# Altium PCB Project1.PcbDoc
Units mm, origin at the board's own origin, x right, y up, seen from the top; angles counter-clockwise.
Board outline 70 x 75 mm, 2 copper layers (Top Layer, Bottom Layer); 67 components, 52 nets, 266 pads, 0 vias.
Unrouted connection lines stored in the file: 162.
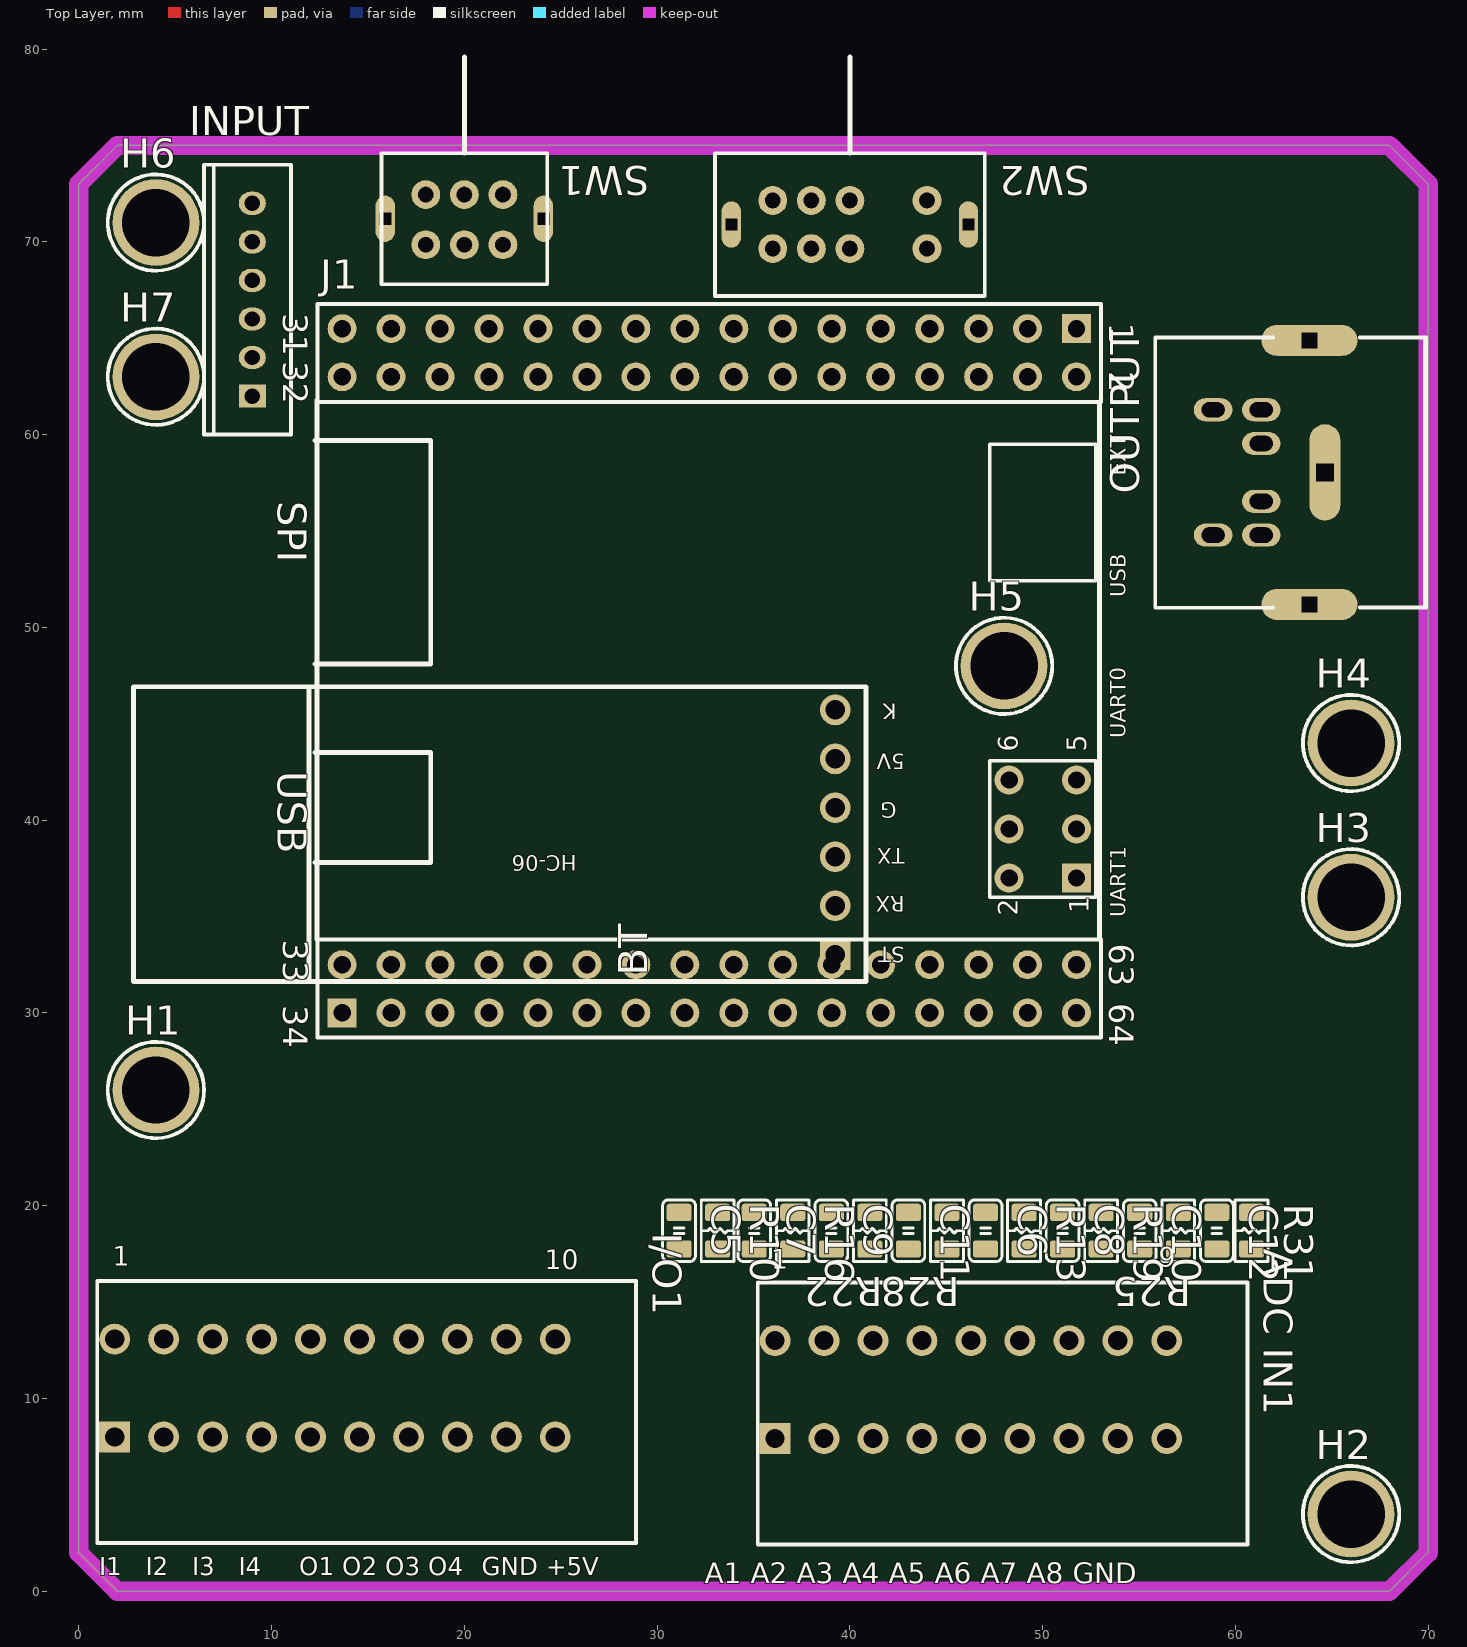
[diagram p0: Top Layer view]
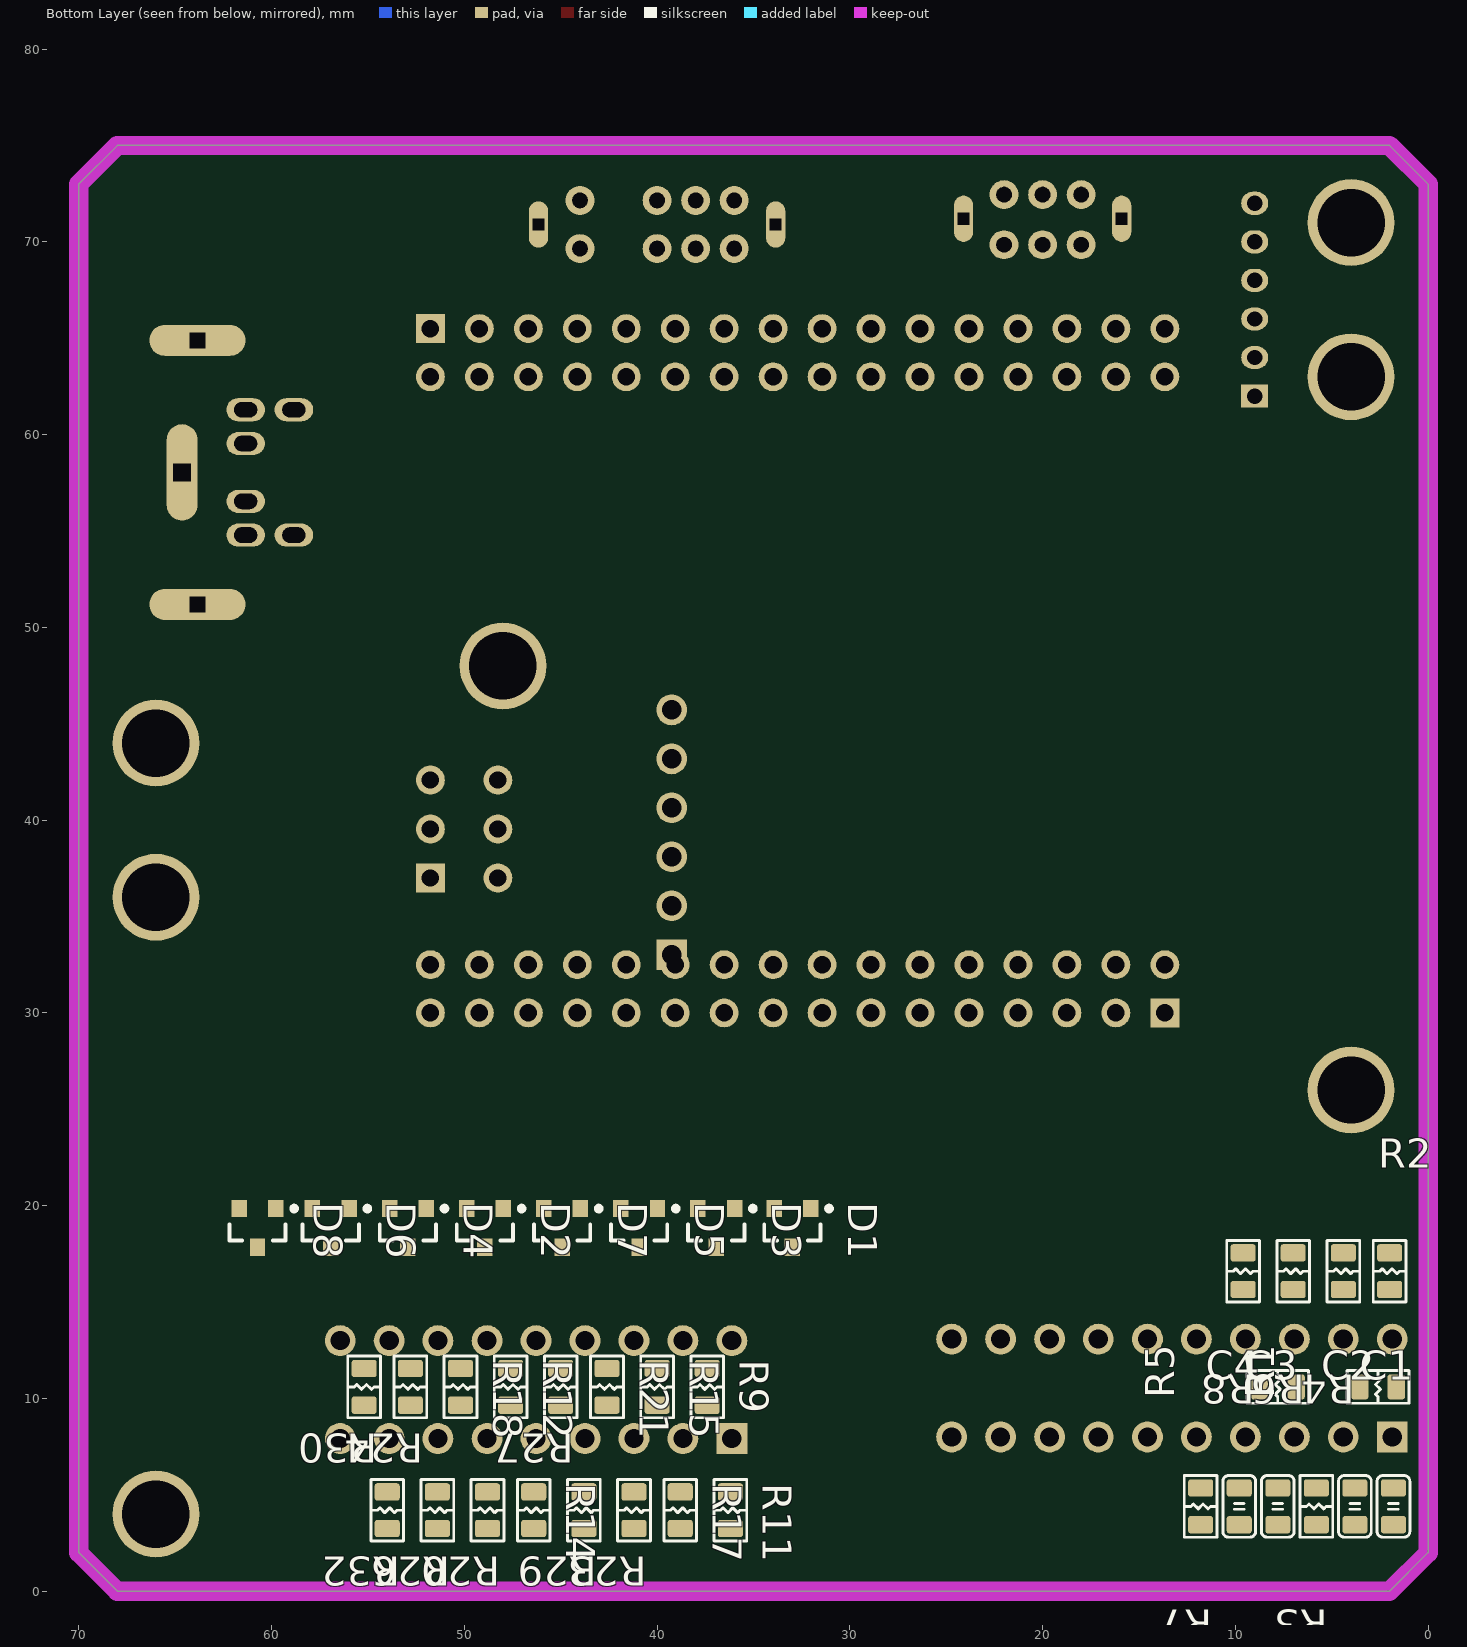
[diagram p1: Bottom Layer view, seen from below]

## Layer stack, top to bottom
Top Solder: solder mask 0.0102, Solder Resist, Dk 3.5
Top Layer: signal copper 0.0356
Dielectric 1: dielectric 0.32, FR-4, Dk 4.8
Bottom Layer: signal copper 0.0356
Bottom Solder: solder mask 0.0102, Solder Resist, Dk 3.5

## Board outline
0,2 2,0 68,0 70,2 70,73 68,75 2,75 0,73

## Design rules (kind name [scope] priority, off if disabled: settings)
Clearance [All] p1: gap=0.254 ignorepadtopadclearanceinfootprint=FALSE except(0: Arc-Hole Track-Hole SMDPad-Hole THPad-Hole Via-Hole Fill-Hole Poly-Hole Region-Hole Text-Hole)
PolygonConnect [All] p1: connectstyle=Relief reliefconductorwidth=0.254 reliefentries=4 polygonreliefangle="90 Angle" airgapwidth=0.254
RoomDefinition CON_MCU [InComponentClass('CON_MCU')] p1: confinementstyle=ConfineIn formatcopy=TRUE lockcomponents=FALSE outline -111.506,-66.802 -60.706,-66.802 -60.706,-41.402 -111.506,-41.402
RoomDefinition "ADC SCH" [InComponentClass('ADC SCH')] p2: confinementstyle=ConfineIn formatcopy=TRUE lockcomponents=FALSE outline -111.506,-66.802 -60.706,-66.802 -60.706,-41.402 -111.506,-41.402
RoutingVias [All] p1: holewidth=0.6 width=1 viastyle="Through Hole" minholewidth=0.6 minwidth=1 maxholewidth=0.711 maxwidth=1.27
SolderMaskExpansion [All] p1: expansion=0.102 istentingtop=FALSE
Width [All] p1: maxlimit=0.254 minlimit=0.254 preferedwidth=0.254
30 further rules are at their usual default settings.

## Classes and differential pairs
net class PWR: 5V 12V GND
component class CON_MCU: "ADC IN1" BT C1 C2 C3 C4 H1 H2 H3 H4 H5 H6 H7 I/O1 INPUT J1 OUTPUT R1 R2 R3 R4 R5 R6 R7 R8 SW1 SW2
component class "ADC SCH": C5 C6 C7 C8 C9 C10 C11 C12 D1 D2 D3 D4 D5 D6 D7 D8 R9 R10 R11 R12 R13 R14 R15 R16 R17 R18 R19 R20 R21 R22 R23 R24 R25 R26 R27 R28 R29 R30 R31 R32

## Components (designator, comment, footprint, x,y, rotation, side; value= is the part's Value field where it differs from the comment)
"ADC IN1" "SL900R-9" SL-900R-9 46.28,10.46 r0 top
BT "HC-06" HC-06 39.243,33.02 r180 top
C1 "1nF" C2012 1.8,4.4 r90 bottom
C2 "1nF" C2012 3.8,4.4 r90 bottom
C3 "1nF" C2012 7.8,4.4 r90 bottom
C4 "1nF" C2012 9.8,4.4 r90 bottom
C5 "100pF" C2012 31.138,18.7 r270 top
C6 "100pF" C2012 47.038,18.7 r270 top
C7 "100pF" C2012 35.038,18.7 r270 top
C8 "100pF" C2012 51.038,18.7 r270 top
C9 "100pF" C2012 39.038,18.7 r270 top
C10 "100pF" C2012 55.038,18.7 r270 top
C11 "100pF" C2012 43.038,18.7 r270 top
C12 "100pF" C2012 59.038,18.7 r270 top
D1 "MMBZ33VALT1G" ONSC-SOT-23-3-318-08_V 32.98,18.85 r270 bottom
D2 "MMBZ33VALT1G" ONSC-SOT-23-3-318-08_V 48.93,18.85 r270 bottom
D3 "MMBZ33VALT1G" ONSC-SOT-23-3-318-08_V 36.93,18.85 r270 bottom
D4 "MMBZ33VALT1G" ONSC-SOT-23-3-318-08_V 52.93,18.85 r270 bottom
D5 "MMBZ33VALT1G" ONSC-SOT-23-3-318-08_V 40.93,18.85 r270 bottom
D6 "MMBZ33VALT1G" ONSC-SOT-23-3-318-08_V 56.93,18.85 r270 bottom
D7 "MMBZ33VALT1G" ONSC-SOT-23-3-318-08_V 44.93,18.85 r270 bottom
D8 "MMBZ33VALT1G" ONSC-SOT-23-3-318-08_V 60.73,18.85 r270 bottom
H1 "HOLE" HOLE_3MM 4,26 r0 top
H2 "HOLE" HOLE_3MM 66,4 r0 top
H3 "HOLE" HOLE_3MM 66,36 r0 top
H4 "HOLE" HOLE_3MM 66,44 r0 top
H5 "HOLE" HOLE_3MM 48,48 r0 top
H6 "HOLE" HOLE_3MM 4,71 r0 top
H7 "HOLE" HOLE_3MM 4,63 r0 top
I/O1 "SL900R-10" SL-900R-10 13.29,10.54 r0 top
INPUT "2.54mm 6 HOLE" "2.54mm 6 HOLE" 9,62 r90 top
J1 "ATMEL MODULE" "ATMEL MODULE" 32.71,47.75 r270 top
OUTPUT "MD-60S/DIN6PIN" "TAIT-MDS-508B6L_V - duplicate" 69.843,58.039 r180 top
R1 "1K" R2012 2.6,10.6 r0 bottom
R2 "10K" R2012 2,16.6 r90 bottom
R3 "1K" R2012 5.8,4.4 r270 bottom
R4 "10K" R2012 4.4,16.6 r270 bottom
R5 "1K" R2012 7.8,10.6 r0 bottom
R6 "10K" R2012 7,16.6 r270 bottom
R7 "1K" R2012 11.8,4.4 r270 bottom
R8 "10K" R2012 9.6,16.6 r270 bottom
R9 "1K" R2012 37.4,10.6 r270 bottom
R10 "1K" R2012 33.138,18.7 r270 top
R11 "1M" R2012 36.2,4.2 r270 bottom
R12 "1K" R2012 47.6,10.6 r270 bottom
R13 "1K" R2012 49.038,18.7 r270 top
R14 "1M" R2012 46.4,4.2 r270 bottom
R15 "1K" R2012 40,10.6 r270 bottom
R16 "1K" R2012 37.038,18.7 r270 top
R17 "1M" R2012 38.8,4.2 r270 bottom
R18 "1K" R2012 50.2,10.6 r270 bottom
R19 "1K" R2012 53.038,18.7 r270 top
R20 "1M" R2012 48.8,4.2 r270 bottom
R21 "1K" R2012 42.6,10.6 r270 bottom
R22 "1K" R2012 41.038,18.7 r270 top
R23 "1M" R2012 41.2,4.2 r270 bottom
R24 "1K" R2012 52.8,10.6 r270 bottom
R25 "1K" R2012 57.038,18.7 r270 top
R26 "1M" R2012 51.4,4.2 r270 bottom
R27 "1K" R2012 45,10.6 r270 bottom
R28 "1K" R2012 45.038,18.7 r270 top
R29 "1M" R2012 43.8,4.2 r270 bottom
R30 "1K" R2012 55.2,10.6 r270 bottom
R31 "1K" R2012 60.838,18.7 r270 top
R32 "1M" R2012 54,4.2 r270 bottom
SW1 "OS202011MA0QN1" OS202011MA0QN1 20,74.6 r270 top
SW2 "OS203011MA2QP1" OS203011MA2QP1 40,74.6 r270 top

## Footprints (in the part's own frame and the unit in brackets; to place one, negate y for a bottom-side part, rotate by r counter-clockwise, add the part's x,y. Pads: shape width x height; smd on the part's side, far side on the other; paste and mask are expansions set on the pad)
"2.54mm 6 HOLE" [mm] "Connector; Header; 6 Position"
  rect 1.2x1.4 hole 0.8: 1(0,0)
  oval 1.2x1.4 hole 0.8: 2(2,0) 3(4,0) 4(6,0) 5(8,0) 6(10,0)
  silkscreen extent -2,-2 12,2.5
"ATMEL MODULE" [mm] "Connector; Header; 16x2 Position"
  rect 1.5x1.5 hole 0.9: 1(-17.75,19.05) 34(17.75,-19.05) A1(10.75,19.05)
  round 1.5 hole 0.9: 2(-15.25,19.05) 3(-17.75,16.51) 4(-15.25,16.51) 5(-17.75,13.97) 6(-15.25,13.97) 7(-17.75,11.43) 8(-15.25,11.43) 9(-17.75,8.89) 10(-15.25,8.89) 11(-17.75,6.35) 12(-15.25,6.35) 13(-17.75,3.81) 14(-15.25,3.81) 15(-17.75,1.27) 16(-15.25,1.27) 17(-17.75,-1.27) 18(-15.25,-1.27) 19(-17.75,-3.81) 20(-15.25,-3.81) 21(-17.75,-6.35) 22(-15.25,-6.35) 23(-17.75,-8.89) 24(-15.25,-8.89) 25(-17.75,-11.43) 26(-15.25,-11.43) 27(-17.75,-13.97) 28(-15.25,-13.97) 29(-17.75,-16.51) 30(-15.25,-16.51) 31(-17.75,-19.05) 32(-15.25,-19.05) 33(15.25,-19.05) 35(15.25,-16.51) 36(17.75,-16.51) 37(15.25,-13.97) 38(17.75,-13.97) 39(15.25,-11.43) 40(17.75,-11.43) 41(15.25,-8.89) 42(17.75,-8.89) 43(15.25,-6.35) 44(17.75,-6.35) 46(17.75,-3.81) 47(15.25,-3.81) 47(15.25,-1.27) 48(17.75,-1.27) 49(15.25,1.27) 50(17.75,1.27) 51(15.25,3.81) 52(17.75,3.81) 53(15.25,6.35) 54(17.75,6.35) 55(15.25,8.89) 56(17.75,8.89) 57(15.25,11.43) 58(17.75,11.43) 59(15.25,13.97) 60(17.75,13.97) 61(15.25,16.51) 62(17.75,16.51) 63(15.25,19.05) 64(17.75,19.05) A2(10.75,15.55) A3(8.21,19.05) A4(8.21,15.55) A5(5.67,19.05) A6(5.67,15.55)
  silkscreen extent -19.02,-20.45 19.02,20.32
C2012 [mm]
  rrect30% 0.9x1.3 smd mask+0: 1(-0.95,0) 2(0.95,0)
  silkscreen extent -1.6,-0.85 1.6,0.85, body extent -1,-0.62 1,0.63, height 1.22
HC-06 [mm]
  rect 1.6x1.6 hole 1.02: 1(0,0)
  round 1.6 hole 1.02: 2(0,-2.54) 3(0,-5.08) 4(0,-7.62) 5(0,-10.16) 6(0,-12.7)
  silkscreen extent -1.6,-13.9 36.4,1.4, body extent -6.5,-13.75 36.25,1.25, height 8
HOLE_3MM [mm]
  round 4.5 hole 3.5 mask+0.127: 1(0,0)
  silkscreen extent -2.5,-2.5 2.5,2.5
ONSC-SOT-23-3-318-08_V [mm] "SOT23, 3-Leads, Body 2.92x1.3mm, Pitch 0.95mm"
  rect 0.9x0.8 smd: 1(-1,0.95) 2(-1,-0.95) 3(1,0)
  silkscreen extent -1.12,-1.46 0.65,2.02, body extent -0.65,-1.46 0.65,1.46, height 1.11
OS202011MA0QN1 [mm] "Mini DIN Connector"
  round 1.5 hole 0.8: 1(4.75,2) 2(4.75,0) 3(4.75,-2) 4(2.15,2) 5(2.15,0) 6(2.15,-2)
  oval 2.4x1 hole 0.6 square: MH1(3.4,4.1) MH2(3.4,-4.1)
  silkscreen extent -5,-4.3 6.8,4.3
OS203011MA2QP1 [mm] "Mini DIN Connector"
  round 1.5 hole 0.8: 1(4.95,4) 2(4.95,0) 3(4.95,-2) 4(4.95,-4) 5(2.45,4) 6(2.45,0) 7(2.45,-2) 8(2.45,-4)
  oval 2.4x1 hole 0.6 square: MH1(3.7,6.15) MH2(3.7,-6.15)
  silkscreen extent -5,-7 7.4,7
R2012 [mm]
  rrect30% 0.9x1.3 smd mask+0: 1(-0.95,0) 2(0.95,0)
  silkscreen extent -1.6,-0.85 1.6,0.85, body extent -1,-0.62 1,0.63, height 0.59
SL-900R-9 [mm] "Connector; Header; 11x2 Position"
  rect 1.6x1.6 hole 1: 1(-10.16,-2.54)
  round 1.6 hole 1: 1(-10.16,2.54) 2(-7.62,-2.54) 2(-7.62,2.54) 3(-5.08,-2.54) 3(-5.08,2.54) 4(-2.54,-2.54) 4(-2.54,2.54) 5(0,-2.54) 5(0,2.54) 6(2.54,-2.54) 6(2.54,2.54) 7(5.09,-2.54) 7(5.09,2.54) 8(7.62,-2.54) 8(7.62,2.54) 9(10.16,-2.54) 9(10.16,2.54)
  silkscreen extent -11.06,-8.04 14.34,5.56, body extent -11.06,-8.04 11.8,5.56, height 13.29
SL-900R-10 [mm] "Connector; Header; 11x2 Position"
  rect 1.6x1.6 hole 1: 1(-11.43,-2.54)
  round 1.6 hole 1: 1(-11.43,2.54) 2(-8.89,-2.54) 2(-8.89,2.54) 3(-6.35,-2.54) 3(-6.35,2.54) 4(-3.81,-2.54) 4(-3.81,2.54) 5(-1.27,-2.54) 5(-1.27,2.54) 6(1.27,-2.54) 6(1.27,2.54) 7(3.82,-2.54) 7(3.82,2.54) 8(6.35,-2.54) 8(6.35,2.54) 9(8.89,-2.54) 9(8.89,2.54) 10(11.43,-2.54) 10(11.43,2.54)
  silkscreen extent -12.33,-8.04 15.62,5.56, body extent -12.33,-8.04 13.07,5.56, height 13.29
"TAIT-MDS-508B6L_V - duplicate" [mm] "Mini DIN Connector"
  oval 2x1.2 hole 1.2 slot 0.8 at 90 deg: 1(8.5,-1.5) 2(8.5,1.5) 3(8.5,-3.25) 4(8.5,3.25) 5(11,-3.25) 6(11,3.25)
  oval 1.6x5 hole 0.9 square unplated: 7(5.2,0)
  oval 5x1.6 hole 0.8 square: MH1(6,-6.85) MH2(6,6.85)
  silkscreen extent -0.05,-7 14,7.02, body extent -0.1,-7.03 12.7,6.97, height 13

## Part data
"ADC IN1": library part "Header 9", "Header, 9-Pin", LatestRevisionDate=17-Jul-2002, LatestRevisionNote="Re-released for DXP Platform.", Publisher="Altium Limited"
BT INPUT: library part "Header 6", "Header, 6-Pin", LatestRevisionDate=17-Jul-2002, LatestRevisionNote="Re-released for DXP Platform.", Publisher="Altium Limited"
C1 C2 C3 C4 C5 C6 C7 C8 C9 C10 C11 C12: library part CAP, Manufacturer="AVX Interconnect / Elco", Part Number=08051A102JAT2A
D1 D2 D3 D4 D5 D6 D7 D8: library part ONSC-K1K2A3-3, "40 W Peak Power Zener Transient Voltage Suppressor, Dual Common Anode Zeners for ESD Protection, 3-Pin SOT-23, Pb-Free, Tape and Reel", Manufacturer="On Semiconductor", ComponentLink1Description="Manufacturer URL", ComponentLink1URL=http://www.onsemi.com/, ComponentLink2Description=Datasheet, ComponentLink2URL=http://www.onsemi.com/pub_link/Collateral/MMBZ5V6ALT1-D.PDF, ComponentLink3Description="Package Specification", ComponentLink3URL=http://www.onsemi.cn/pub_link/Collateral/318-08.PDF, DatasheetVersion="Rev. 13", Direction=Unidirectional, IR Max (uA)=0.05, Mounting Technology="Surface Mount", PackageDescription="3-Pin Small Outline Transistor, Body 2.92 x 1.3 mm, Pitch 0.95 mm", PackageReference=SOT-23-3-318-08, PackageVersion="Rev. AP, 11/2009", Packing="Tape and Reel", PartNumber=MMBZ33VALT1G, PPK Max (W)=40, RoHS=Pb-Free, V(BR) Typ (V)=33
H1 H2 H3 H4 H5 H6 H7: library part MH
I/O1: library part "Header 10", "Header, 10-Pin", LatestRevisionDate=17-Jul-2002, LatestRevisionNote="Re-released for DXP Platform.", Publisher="Altium Limited"
OUTPUT: library part CUI-MD-60S-6, "Right Angle Mini DIN Connector, 100 Vac, 12 Vdc, -40 to 85 degC, 6-Pin THD, RoHS, Bulk", Current Rating=1A,2A, Manufacturer="CUI Inc", Operating Temperature=-40°C~85°C, Package Description="6-Pin Through Hole Device, Body 14 x 12.4 mm, Height 13.1 mm", Package Reference=MD-60S, Standard Package=300, Voltage - Rated=100VAC,12VDC, 3D Model=MD-60S, Category=Connectors,Interconnects, Connector Type=Receptacle,FemaleSockets, Contact Finish=Silver, Contact Finish Thickness=-, Datasheet URL=http://www.cui.com/product/resource/md-xxs.pdf, Datasheet Version="Rev. 1.02, 03/2012", Family=CircularConnectors, Fastening Type=Push-Pull, Features=-, Ingress Protection=-, Manufacturer URL=http://www.cui.com/, Mating Products=CP-2060-ND-CONNMINI-DIN6PINMALE, Mounting Technology=ThroughHole, Mounting Type=ThroughHole,RightAngle, Number of Positions=6, Online Catalog=MD, Orientation=Keyed, Other Names=045-0036RCP-2460MD60S, Packaging=Bulk, RoHS Information=MD-x0SCertofCompliance, Series=MD, Shell Material, Finish=PolybutyleneTerephthalate(PBT), Shell Size - Insert=MiniDIN, Shell Size, MIL=-, Termination=Solder
R1 R2 R3 R4 R5 R6 R7 R8 R9 R10 R11 R12 R13 R14 R15 R16 R17 R18 R19 R20 R21 R22 R23 R24 R25 R26 R27 R28 R29 R30 R31 R32: library part RES-2, "Chip Resistor, 4.7 KOhm, +/- 1%, 0.125 W, -55 to 155 degC, 0805 (2012 Metric), RoHS, Tape and Reel", Case Code (Imperial)=0805, Case Code (Metric)=2012, Manufacturer="Vishay Semiconductor", Max Operating Temperature=155degC, Max Power Dissipation=125mW, Min Operating Temperature=-55degC, Package Description="2-Pin Surface Mount Device, Body 2.05 x 1.25 mm", Package Quantity=10, Resistance=4.7KOhm, Temperature Coefficient=100ppm/degreesC, Tolerance=1%, Voltage Rating=150V, Case/Package=0805, Composition=ThickFilm, Contact Plating=Tin, Datasheet URL=https://datasheet.ciiva.com/11808/0900766b80d98b26-11808992.pdf, Datasheet Version=41061.0, Depth=1.25mm, Height=0.45mm, Lead Free=LeadFree, Length=2mm, Manufacturer URL=http://www.vishay.com/, Military Standard=Not, Number of Terminations=2, Package Reference=0805, Packaging=TapeandReel, Power Rating=125mW, Radiation Hardening=No, REACH SVHC=Unknown, RoHSCompliant=true, Termination=SMD/SMT, Voltage Rating (DC)=150V, Weight=0.000194oz, Width=1.25mm
SW1: library part SW-DPDT-6, "Slide Switch, MHS Series, Double Pole, Vertical, 125 V (AC), -20 to 85 degC, 6-Pin THD, RoHS, Bulk", ComponentLink1Description="Manufacturer URL", ComponentLink1URL=http://www.te.com/, ComponentLink2Description=Datasheet, ComponentLink2URL=http://www.te.com/commerce/DocumentDelivery/DDEController?Action=showdoc&DocId=Catalog+Section%7F1308111-1_SWITCHES_CORE_PROGRAM_CATALOG%7F0308%7Fpdf%7FEnglish%7FENG_CS_1308111-1_SWITCHES_CORE_PROGRAM_CATALOG_0308.pdf%7F1825289-1, ComponentLink3Description="Package Specification", ComponentLink3URL=http://www.te.com/commerce/DocumentDelivery/DDEController?Action=showdoc&DocId=Customer+Drawing%7F1825289%7FB3%7Fpdf%7FEnglish%7FENG_CD_1825289_B3.pdf%7F1825289-1, DatasheetVersion=Mar-08, PackageDescription="6-Pin Through Hole Device, Body 16 x 6.7 mm, Height 12.05 mm", PackageReference=1825289-1
SW2: library part CMP-17877-000002-1, "SWITCH SLIDE DP3T 200MA 30V", Contact Resistance=20mΩ, Current Rating=0.2A, Manufacturer=E-Switch, Manufacturer Part Number=EG2301, Temperature="-20°C to +70°C", Temperature Range High=+70°C, Temperature Range Low=-20°C, Voltage Rating Dc=30V, Automotive=No, Category=Switch, ComponentLink2Description=Datasheet, ComponentLink2URL=https://www.e-switch.com/system/asset/product_line/data_sheet/119/EG.pdf, Device Class L1=Electromechanical, Device Class L2=Switches, Device Class L3="Slide Switches", Digikey Description="SWITCH SLIDE DP3T 200MA 30V", Electromechanical Life=10000Cycles, Footprint Url=http://spec_sheets.e-switch.com/specs/P040180.pdf, Height=11.8mm, Lead Free=Yes, Manufacturer 1=E-Switch, Manufacturer Part Number 1=EG2301, Mount="Through Hole", Mouser Description="Slide Switches DP3T PC MNT SLIDE", Octopart=https://octopart.com/eg2301-e-switch-1438660, Package=EG2301, RoHS=TRUE, Throw Configuration=DP3T

## Nets (pads, with @x,y where several pads share a name; then routed paths per layer and width w, separated by ;. In a path a pad name is that pad's centre, name@x,y a point inside that pad or via, vN(x,y) a via of type N, cw(c..) or ccw(c..) an arc to the next point about the centre after c; other vN are vias at no path point)
5V: BT.5 D1.2 D2.2 D3.2 D4.2 D5.2 D6.2 D7.2 D8.2 I/O1.10 INPUT.4 J1.23 J1.24 J1.52 OUTPUT.4 R1.2 R3.2 R5.2 R7.2
12V: INPUT.6 OUTPUT.6
ADC_IN_0: "ADC IN1.1" R9.2 R11.1
ADC_IN_1: "ADC IN1.2" R15.2 R17.1
ADC_IN_2: "ADC IN1.3" R21.2 R23.1
ADC_IN_3: "ADC IN1.4" R27.2 R29.1
ADC_IN_4: "ADC IN1.5" R12.2 R14.1
ADC_IN_5: "ADC IN1.6" R18.2 R20.1
ADC_IN_6: "ADC IN1.7" R24.2 R26.1
ADC_IN_7: "ADC IN1.8" R30.2 R32.1
BT(RX0): BT.2 SW1.4
BT(TX0): BT.3 SW1.1
GND: "ADC IN1.9" BT.4 C1.1 C2.1 C3.1 C4.1 C5.2 C6.2 C7.2 C8.2 C9.2 C10.2 C11.2 C12.2 D1.1 D2.1 D3.1 D4.1 D5.1 D6.1 D7.1 D8.1 I/O1.9 INPUT.3 J1.21 J1.22 J1.53 J1.63 OUTPUT.3 OUTPUT.7 R11.2 R14.2 R17.2 R20.2 R23.2 R26.2 R29.2 R32.2 SW1.MH1 SW1.MH2 SW2.MH1 SW2.MH2
IN_RX(SDA): INPUT.1 SW2.6
IN_TX(SCL): INPUT.5 OUTPUT.5 SW2.2 SW2.4
NetD1_3: D1.3 R9.1 R10.2
NetD2_3: D2.3 R12.1 R13.2
NetD3_3: D3.3 R15.1 R16.2
NetD4_3: D4.3 R18.1 R19.2
NetD5_3: D5.3 R21.1 R22.2
NetD6_3: D6.3 R24.1 R25.2
NetD7_3: D7.3 R27.1 R28.2
NetD8_3: D8.3 R30.1 R31.2
NetJ1_A1: J1.A1 SW2.5
NetJ1_A2: J1.A2 SW2.1
OUT_RX(SDA): OUTPUT.1 SW2.8
PD0(SCL): J1.25 SW2.3
PD1(SDA): J1.26 SW2.7
PE0(RX0): J1.A6 SW1.2
PE1(TX0): J1.A5 SW1.5
PE2: I/O1.5 J1.4
PE3: I/O1.6 J1.5
PE4: I/O1.7 J1.6
PE5: I/O1.8 J1.7
PF0(ADC0): C5.1 J1.61 R10.1
PF1(ADC1): C7.1 J1.60 R16.1
PF2(ADC2): C9.1 J1.59 R22.1
PF3(ADC3): C11.1 J1.58 R28.1
PF4(ADC4): C6.1 J1.57 R13.1
PF5(ADC5): C8.1 J1.56 R19.1
PF6(ADC6): C10.1 J1.55 R25.1
PF7(ADC7): C12.1 J1.54 R31.1
PG0: J1.33 R2.1
PG1: J1.34 R4.1
PG2: J1.43 R6.1
PG3: J1.18 R8.1
SW_IN_1: C1.2 I/O1.1 R1.1 R2.2
SW_IN_2: C2.2 I/O1.2 R3.1 R4.2
SW_IN_3: C3.2 I/O1.3 R5.1 R6.2
SW_IN_4: C4.2 I/O1.4 R7.1 R8.2
USB_RX: J1.A3 SW1.6
USB_TX: J1.A4 SW1.3
pads on no net: BT.1 BT.6 H1.1 H2.1 H3.1 H4.1 H5.1 H6.1 H7.1 INPUT.2 J1.1 J1.2 J1.3 J1.8 J1.9 J1.10 J1.11 J1.12 J1.13 J1.14 J1.15 J1.16 J1.17 J1.19 J1.20 J1.27 J1.28 J1.29 J1.30 J1.31 J1.32 J1.35 J1.36 J1.37 J1.38 J1.39 J1.40 J1.41 J1.42 J1.44 J1.46 J1.47 J1.48 J1.49 J1.50 J1.51 J1.62 J1.64 OUTPUT.2 OUTPUT.MH1 OUTPUT.MH2
copper on no net: | length 2.8
  Top Layer w0.254: 0,2 2,0

## Keep-outs
Keep-Out Layer:
  lines w1: 0,2 0,66 0,73 2,75 68,75 70,73 70,66 70,2 68,0 2,0 0,2

## Silkscreen, mask and mechanical layers (free items; w line width, h text height)
Top Overlay:
  text "I1   I2   I3   I4" at 1.071,0.511 h1.6
  text "O1 O2 O3 O4" at 11.425,0.511 h1.6
  text "GND +5V" at 20.91,0.511 h1.6
  text "A1 A2 A3 A4 A5 A6 A7 A8 GND" at 32.471,0.048 h1.8
Out:
  the board outline again, w0.254

## Dimensions
1.5,71 to 2,75 on Drill Drawing
1.5,63 to 1.5,71 on Drill Drawing
66,44 to 66,36 on Drill Drawing
0,73 to 70,73 on Drill Drawing
2,0 to 0,2 on Drill Drawing
2,0 to 2,75 on Drill Drawing

## Text inside footprints (layer, text, board x,y; h text height)
"ADC IN1": Top Overlay "1" at 35.92,16.72 h1; Top Overlay "9" at 56.02,16.82 h1
BT: Top Overlay "K" at 42.443,46.04 h0.8 r180; Top Overlay "5V" at 42.843,43.44 h0.8 r180; Top Overlay "G" at 42.443,40.94 h0.8 r180; Top Overlay "TX" at 42.843,38.54 h0.8 r180; Top Overlay "RX" at 42.843,36.04 h0.8 r180; Top Overlay "ST" at 42.843,33.44 h0.8 r180
I/O1: Top Overlay "1" at 1.76,16.892 h1; Top Overlay "10" at 24.16,16.7 h1
J1: Top Overlay "32" at 10.619,63.8 h1.27 r270; Top Overlay "UART0" at 54.306,44.254 h0.8 r90; Top Overlay "34" at 10.619,30.4 h1.27 r270; Top Overlay "33" at 10.619,33.8 h1.27 r270; Top Overlay "31" at 10.619,66.3 h1.27 r270; Top Overlay "2" at 53.455,63.3 h1.27 r270; Top Overlay "63" at 53.455,33.6 h1.27 r270; Top Overlay "64" at 53.455,30.5 h1.27 r270; Top Overlay "1" at 53.455,65.8 h1.27 r270; Top Overlay "SPI" at 10.314,56.546 h1.52 r270; Top Overlay "USB" at 10.314,42.546 h1.52 r270; Top Overlay "UART1" at 54.306,34.954 h0.8 r90; Top Overlay "EXT" at 54.306,57.854 h0.8 r90; Top Overlay "USB" at 54.306,51.554 h0.8 r90; Top Overlay "5" at 52.268,43.549 h1 r90; Top Overlay "2" at 48.712,35.04 h1 r90; Top Overlay "1" at 52.395,35.167 h1 r90; Top Overlay "6" at 48.712,43.549 h1 r90
OUTPUT: Top 3D Body "PCB Edge" at 68.7,64.77 h0.8 r270